# Altium PCB RS485.PcbDoc
Units mm, origin at the board's own origin, x right, y up, seen from the top; angles counter-clockwise.
Board outline 49 x 36.25 mm, 2 copper layers (Top Layer, Bottom Layer); 19 components, 12 nets, 52 pads, 0 vias.
Unrouted connection lines stored in the file: 1.
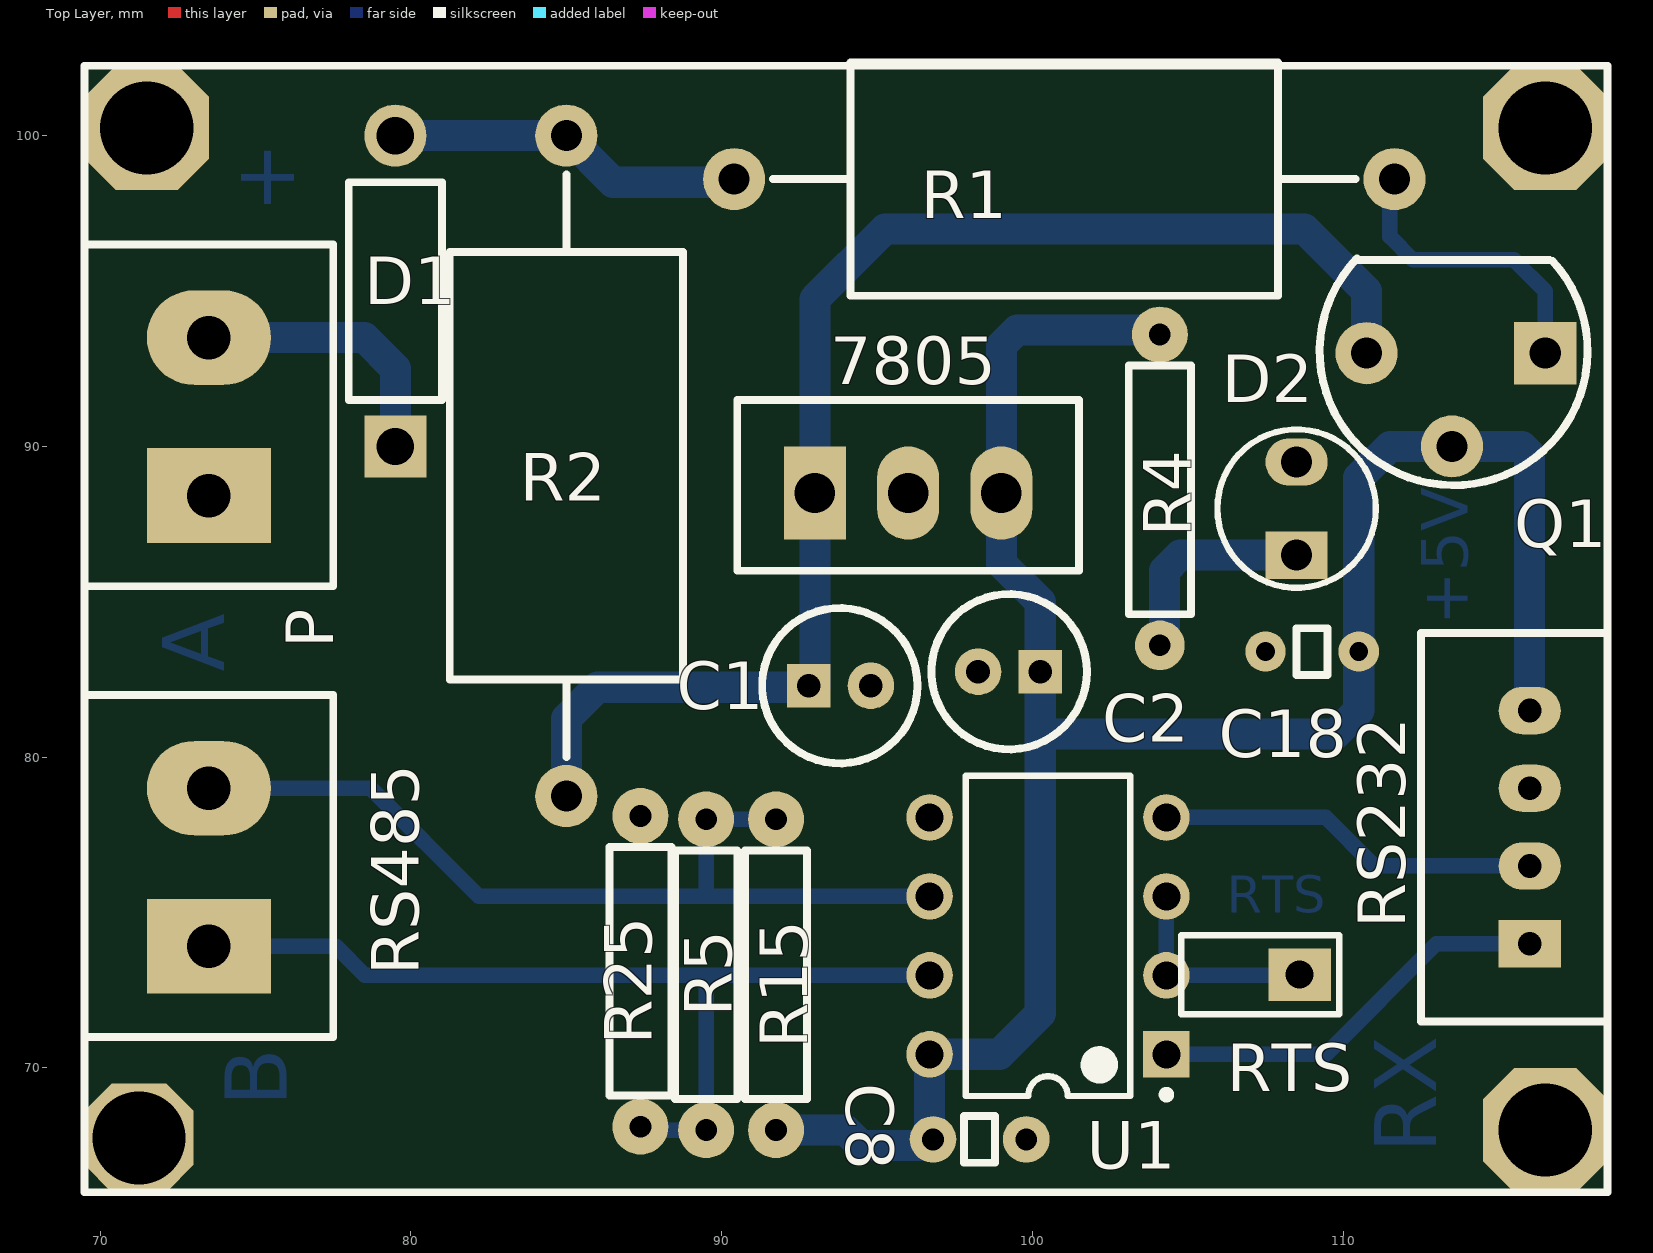
[diagram p0: Top Layer view]
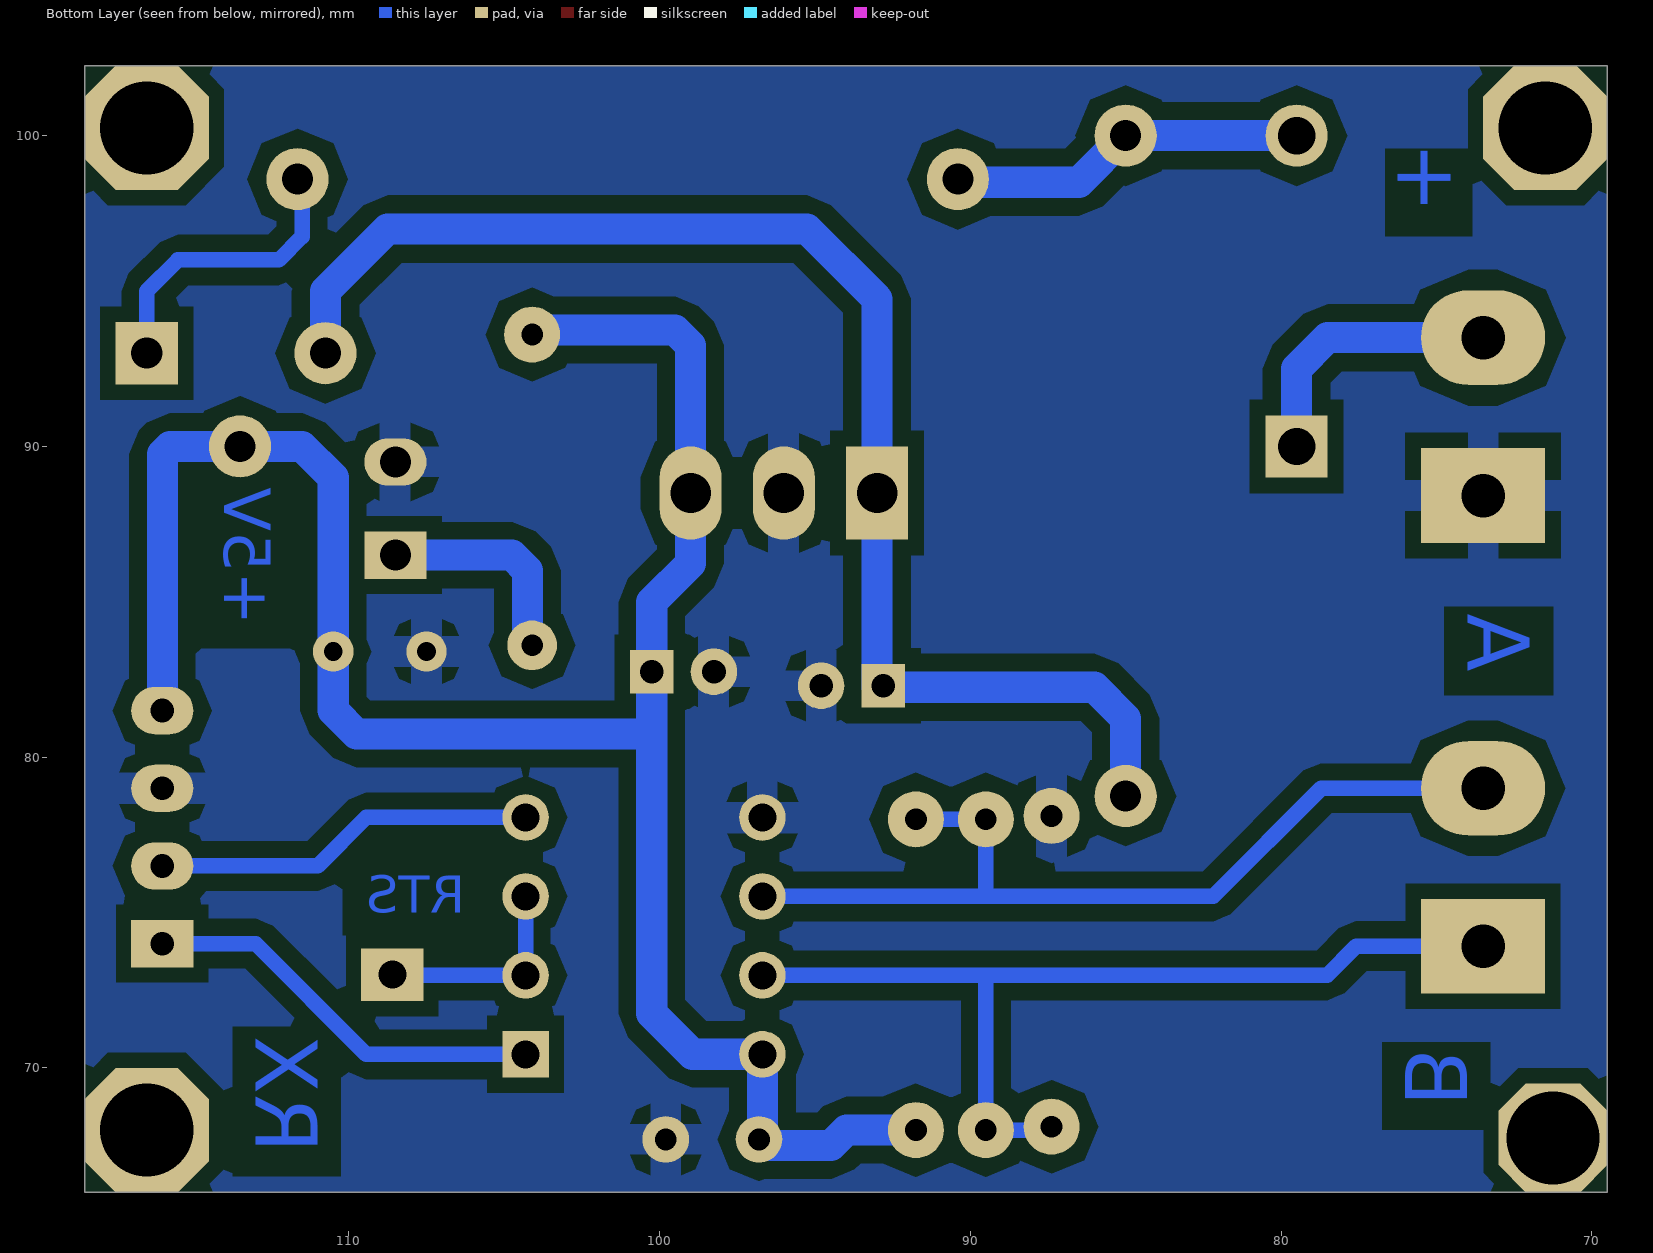
[diagram p1: Bottom Layer view, seen from below]

## Layer stack, top to bottom
Top Layer: signal copper 0.0356
Dielectric: dielectric 0.32, FR-4, Dk 4.8
Bottom Layer: signal copper 0.0356

## Board outline
69.5,102.25 118.5,102.25 118.5,66 69.5,66 69.5,102.25

## Design rules (kind name [scope] priority, off if disabled: settings)
Clearance [All] p1: gap=0.5
PlaneClearance [All] p1: clearance=0.5
PlaneConnect [All] p1: planeconnectstyle=Relief reliefexpansion=1 reliefentries=4 reliefconductorwidth=1 reliefairgap=0.5
PolygonConnect [All] p1: connectstyle=Relief reliefconductorwidth=1 reliefentries=4 polygonreliefangle="90 Angle"
RoutingLayers [All] p1: top layer_v5=FALSE bottom layer_v5=TRUE
RoutingVias [All] p1: holewidth=0.711 width=1.27 viastyle="Through Hole" minholewidth=0.711 minwidth=1.27 maxholewidth=0.711 maxwidth=1.27
SilkscreenOverComponentPads [All] p1: minsilkscreentomaskgap=0.254
SolderMaskExpansion [All] p1: expansion=0.102
Width [All] p1: maxlimit=1 minlimit=0.3 preferedwidth=0.4
24 further rules are at their usual default settings.

## Components (designator, comment, footprint, x,y, rotation, side; value= is the part's Value field where it differs from the comment)
7805 "Volt Reg" 78xx_NO 95.5,88.5 r0 top
C1 "Cap2" "tu 10uF" 94.8,85.3 r0 top
C2 "Cap2" "tu 10uF" 98.25,79.75 r180 top
C8 "Cap" tu_gom#1 97.8,67.7 r180 top
C18 "Cap" tu_gom#2 109.5,83.4 r0 top
D1 "Diode 1N4007" D_2A 79.5,90 r90 top
D2 "LED1" LED_3 108.5,87.5 r90 top
P "Header 2" "Header2 - duplicate" 73.5,93.5 r90 top (schematic designator POWER)
Q1 "A1013" D468/A1013 116,93 r180 top
R1 "Res3" R_CS0R22/2W 100.4,98.6 r0 top
R2 "Res3" R_CS0R22/2W 85,90 r270 top
R4 "Res3" R_Nor#1 104.1,88.6 r90 top
R5 "120R" R_Nor#2 89.5,73 r270 top
R15 "560R" R_Nor#2 91.75,73 r270 top
R25 "560R" R_Nor#2 87.384,73.109 r270 top
RS232 "Header 4" Header4 116,74 r90 top
RS485 "Header 2" "Header2 - duplicate" 73.5,79 r90 top
RTS "Header 2" HDR1X2 108.6,73 r180 top (schematic designator P1)
U1 "MAX485CSA" PA8 100.5,74.25 r180 top (schematic designator MAX485)

## Footprints (in the part's own frame and the unit in brackets; to place one, negate y for a bottom-side part, rotate by r counter-clockwise, add the part's x,y. Pads: shape width x height; smd on the part's side, far side on the other; paste and mask are expansions set on the pad)
78xx_NO [mm]
  rect 2x3 hole 1.3: 1(-2.5,0)
  oval 2x3 hole 1.3: 2(0.5,0) 3(3.5,0)
  silkscreen extent -5,-2.5 6,3
D468/A1013 [mm]
  rect 2x2 hole 1: 1(-0.5,0)
  round 2 hole 1: 2(2.5,3) 3(5.25,0)
  silkscreen extent -1.87,-3.05 6.76,4.25
D_2A [mm]
  rect 2x2 hole 1.2: 1(0,0)
  round 2 hole 1.2: 2(10,0)
  silkscreen extent 1.5,-1.5 8.5,1.5
HDR1X2 [mm] "Connector; Header; 2 Position"
  rect 2x1.7 hole 0.9: 1(0,0)
  round 0 all layers, no hole: 2(2.54,0)
  silkscreen extent -1.27,-1.27 3.81,1.27
"Header2 - duplicate" [mm]
  rect 3.048x4 hole 1.4: 1(-5.08,0)
  oval 3.048x4 hole 1.4: 2(0,0)
  silkscreen extent -8,-4 3,4
Header4 [mil]
  rect 60x78.74 hole 30: 1(0,0)
  oval 60x78.74 hole 30: 2(98.43,0) 3(196.85,0) 4(295.28,0)
  silkscreen extent -98,-98 394,138
LED_3 [mm]
  rect 1.524x2 hole 1: 1(-1,0)
  oval 1.524x2 hole 1: 2(2,0)
  silkscreen extent -2.05,-2.55 3.05,2.55
PA8 [mm] "DIP, 8-Leads, Row Spacing 7.62mm, Pitch 2.54mm, Body 9.38x7.24mm"
  rect 1.5x1.5 hole 0.9: 1(-3.81,3.81)
  round 1.5 hole 0.9: 2(-3.81,1.27) 3(-3.81,-1.27) 4(-3.81,-3.81) 5(3.81,-3.81) 6(3.81,-1.27) 7(3.81,1.27) 8(3.81,3.81)
  silkscreen extent -3.94,-5.15 2.65,5.23, body extent -3.6,-5.15 3.6,5.15, height 4.58
R_CS0R22/2W [mm]
  round 2 hole 1: 1(-10,0) 2(11.25,0)
  silkscreen extent -8.75,-3.75 10,3.75
R_Nor#1 [mm]
  round 1.6 hole 0.7: 1(-5,0)
  round 1.8 hole 0.7: 2(5,0)
  silkscreen extent -4,-1 4,1
R_Nor#2 [mm]
  round 1.8 hole 0.7: 1(-5,0) 2(5,0)
  silkscreen extent -4,-1 4,1
"tu 10uF" [mm]
  rect 1.4x1.4 hole 0.762: 1(-2,-3)
  round 1.5 hole 0.762: 2(0,-3)
  silkscreen extent -3.5,-5.5 1.5,-0.5
tu_gom#1 [mm]
  round 1.5 hole 0.7: 1(-2,0) 2(1,0)
  silkscreen extent -1,-0.75 0,0.75
tu_gom#2 [mm]
  round 1.3 hole 0.6: 1(-2,0) 2(1,0)
  silkscreen extent -1,-0.75 0,0.75

## Part data
7805: "Voltage Regulator"
C1 C2: "Capacitor"
C8 C18: library part Ceramic, "Capcitor"
D1: "1 Amp General Purpose Rectifier"
D2: "Typical RED GaAs LED"
P RS485 RTS: "Header, 2-Pin"
Q1: library part PNP, "PNP Bipolar Transistor"
R1 R2 R4: "Resistor"
R5 R15 R25: library part Res
RS232: "Header, 4-Pin"
U1: "Low-Power, Slew-Rate-Limited RS-485/RS-422 Transceiver"

## Free pads (board coordinates)
  oct 4x4 hole 3: 0(71.5,100.25) 0(116.5,68) 0(116.5,100.25)
  oct 3.5x3.5 hole 3: 1(71.25,67.75)

## Nets (pads, with @x,y where several pads share a name; then routed paths per layer and width w, separated by ;. In a path a pad name is that pad's centre, name@x,y a point inside that pad or via, vN(x,y) a via of type N, cw(c..) or ccw(c..) an arc to the next point about the centre after c; other vN are vias at no path point)
GND: 7805.2 C1.2 C2.2 C8.1 C18.1 D2.2 P.1 R25.1 RS232.3 U1.5 | length 0
  Bottom Layer w0.4: P.1 P.1@73.508,88.42
Net7805_1: 7805.1 C1.1 Q1.3 R2.2 | length 44.9
  Bottom Layer w1: R2.2 85,81.25 86,82.25 93,82.25 7805.1 93,94.75 95.25,97 108.75,97 110.75,95 Q1.3
NetD1_1: D1.1 P.2 | length 8.9
  Bottom Layer w1: P.2 78.5,93.5 79.5,92.5 D1.1
NetD1_2: D1.2 R1.1 R2.1 | length 11.5
  Bottom Layer w1: D1.2 R2.1 86.5,98.5 R1.1@90.4,98.5
NetD2_1: D2.1 R4.1 | length 7
  Bottom Layer w1: R4.1@104.25,83.5 104.25,86 104.75,86.5 D2.1
NetMAX485_6: R5.1 R15.1 RS485.2 U1.6 | length 29.4
  Bottom Layer w0.5: RS485.2 78.709,79 82.189,75.52 U1.6 ; 89.5,75.52 R5.1 R15.1
NetMAX485_7: R5.2 R25.2 RS485.1 U1.7 | length 30.6
  Bottom Layer w0.5: RS485.1 77.58,73.92 78.52,72.98 89.5,72.98 ; R25.2@87.493,68 R5.2 89.5,72.98 ; U1.7 89.5,72.98
NetQ1_1: Q1.1 R1.2 | length 8.7
  Bottom Layer w0.5: R1.2@111.5,97.75 111.5,96.75 112.25,96 115.5,96 116.5,95 Q1.1
OUT_EN: RTS.1 RTS.2 U1.2 U1.3 | length 6.8
  Bottom Layer w0.5: U1.3 U1.2 RTS.1@108.58,72.98
RX: RS232.1 U1.1 | length 12.9
  Bottom Layer w0.5: U1.1 109.44,70.44 113,74 RS232.1@115.75,74
TX: RS232.2 U1.4 | length 12.3
  Bottom Layer w0.5: U1.4 109.44,78.06 111,76.5 RS232.2
VCC: 7805.3 C2.1 C8.2 C18.2 Q1.2 R4.2 R15.2 RS232.4 U1.8 | length 71.8
  Bottom Layer w1: R15.2 93.98,68 94.48,67.5 96.69,67.5 U1.8 98.94,70.44 100.25,71.75 C2.1 100.25,84.988 99,86.238 7805.3 99,93.25 99.5,93.75 R4.2@104.1,93.75 ; 100.25,80.75 109.75,80.75 110.5,81.5 110.5,89 111.5,90 Q1.2 115.75,90 116,89.75 RS232.4

## Polygon pours and split planes (outlines as drawn)
GND on Bottom Layer "Top Layer-No Net" (solid): 69.5,102.25 118.5,102.25 118.5,66 69.5,66 69.5,102.25

## Other copper
Bottom Layer:
  text "+" at 76.25,97.5 h2 r90
  text "+5V" at 114,84.25 h1.5 r90
  text "A" at 74,82.75 h2 r90
  text "RTS" at 106.25,75 h1.2
  text "B" at 76,68.75 h2 r90
  text "RX" at 113,67.25 h2 r90

## Silkscreen, mask and mechanical layers (free items; w line width, h text height)
Top Overlay:
  the board outline again, w0.254